# Altium PCB 把手锁主板2079.PcbDoc (part 1 of 2)
Units mm, origin at the board's own origin, x right, y up, seen from the top; angles counter-clockwise.
Board outline 151.13 x 26.04 mm, 2 copper layers (Top Layer, Bottom Layer); 73 components, 56 nets, 239 pads, 289 vias.
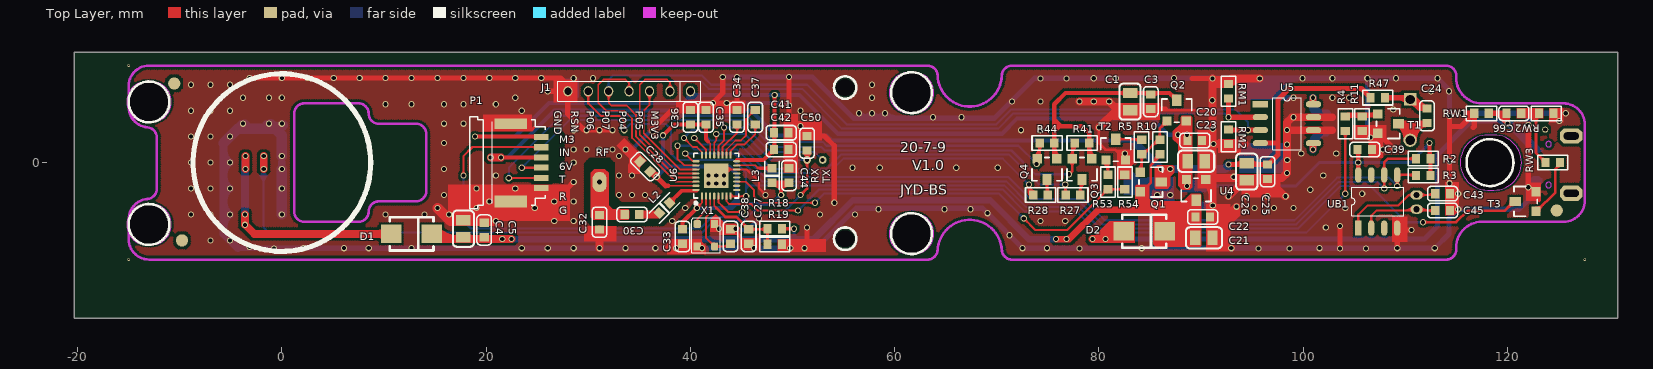
[diagram p0: Top Layer view]
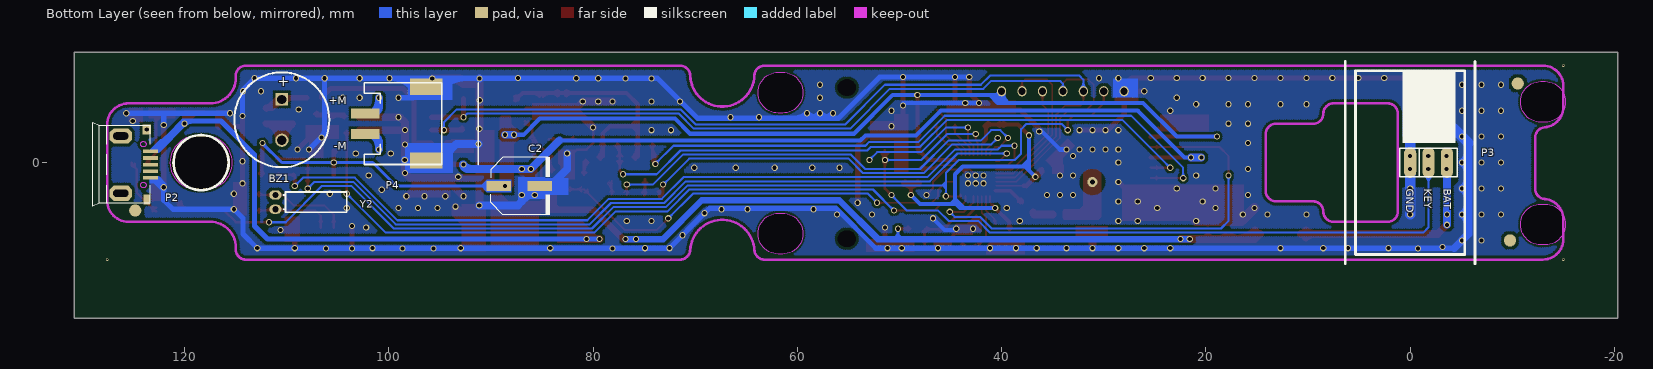
[diagram p1: Bottom Layer view, seen from below]
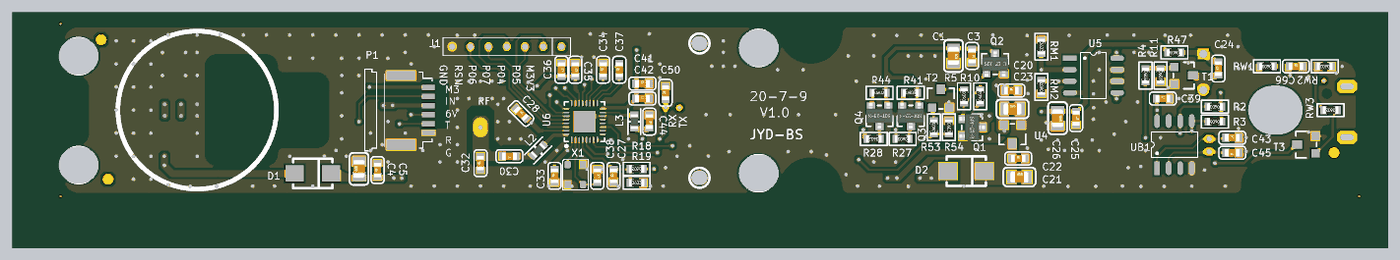
[diagram p3: 3D render of the assembled board from above, using the file's embedded part models]

## Layer stack, top to bottom
Top Layer: signal copper 0.0356
Dielectric: dielectric 0.32, FR-4, Dk 4.8
Bottom Layer: signal copper 0.0356

## Board outline
-20.32,10.795 130.81,10.795 130.81,-15.24 -20.32,-15.24
cut-out: 118.7,2.7 118.1,2.7 ccw(c118.1,0) 115.4,0 ccw(c118.1,0) 118.1,-2.7 118.7,-2.7 ccw(c118.7,0) 121.4,0 ccw(c118.7,0)
cut-out: -12.809,7.943 -13.209,7.943 ccw(c-13.209,5.943) -15.209,5.943 ccw(c-13.209,5.943) -13.209,3.943 -12.809,3.943 ccw(c-12.809,5.943) -10.809,5.943 ccw(c-12.809,5.943)
cut-out: -12.809,-4.057 -13.209,-4.057 ccw(c-13.209,-6.057) -15.209,-6.057 ccw(c-13.209,-6.057) -13.209,-8.057 -12.809,-8.057 ccw(c-12.809,-6.057) -10.809,-6.057 ccw(c-12.809,-6.057)
cut-out: 61.86,-4.957 61.46,-4.957 ccw(c61.46,-6.957) 59.46,-6.957 ccw(c61.46,-6.957) 61.46,-8.957 61.86,-8.957 ccw(c61.86,-6.957) 63.86,-6.957 ccw(c61.86,-6.957)
cut-out: 61.86,8.843 61.46,8.843 ccw(c61.46,6.843) 59.46,6.843 ccw(c61.46,6.843) 61.46,4.843 61.86,4.843 ccw(c61.86,6.843) 63.86,6.843 ccw(c61.86,6.843)

## Design rules (kind name [scope] priority, off if disabled: settings)
Clearance Clearance_2 [(IsWire)or(IsThruPin)or(IsFill)or(InPolygon)or(IsKeepOut) vs (IsWire)or(IsThruPin)or(IsFill)or(InPolygon)or(IsKeepOut)] p1 off: gap=0.254
Clearance Clearance_1 [InComponent('P2')] p2: gap=0.127
Clearance [All] p3: gap=0.2
ComponentClearance [All] p1: gap=0 collisioncheckmode=3 verticalgap=0 showdistances=FALSE
HoleSize [All] p1: absolutevalues=TRUE maxlimit=12.7 minlimit=0.025 maxpercent=80.000 minpercent=20.000
HoleToHoleClearance [All] p1: gap=0 allowstackedmicrovias=TRUE
MinimumSolderMaskSliver [All] p1: minsoldermaskwidth=0
PolygonConnect PolygonConnect_1 [IsVia] p1: connectstyle=Direct reliefconductorwidth=0.254 reliefentries=4 polygonreliefangle="90 Angle" airgapwidth=0.254
PolygonConnect [All] p2: connectstyle=Relief reliefconductorwidth=0.254 reliefentries=4 polygonreliefangle="90 Angle" airgapwidth=0.254
RoutingVias [All] p1: holewidth=7.112 width=12.7 viastyle="Through Hole" minholewidth=0.203 minwidth=0.254 maxholewidth=0.711 maxwidth=1.27
SilkToSilkClearance [All] p1: silktosilkclearance=0
SilkToSolderMaskClearance [IsPad] p1: minsilkscreentomaskgap=0 clearancetoexposedcopper=TRUE
SolderMaskExpansion [All] p1: expansion=0.102
Width [All] p1: maxlimit=2.032 minlimit=0.152 preferedwidth=0.2
22 further rules are at their usual default settings.

## Components (designator, comment, footprint, x,y, rotation, side; value= is the part's Value field where it differs from the comment)
BZ1 "BUZZER" BUZZER_D93_L40 110.49,4.191 r270 bottom
C1 "22uF" 0805C 83.058,5.969 r270 top
C2 "220uF" R5*5.8 87.249,-2.286 r180 bottom
C3 "0.1uF" 0603C 85.09,5.969 r270 top
C4 "4.7UF/24V" 0805C 17.78,-6.477 r90 top
C5 "0.1uF" 0603C 19.812,-6.604 r90 top
C20 "0.1uF" 0603C 89.408,2.159 r0 top
C21 "22uF/10V" 0805C 90.297,-7.366 r0 top
C22 "0.1uF" 0603C 90.17,-5.334 r0 top
C23 "10uF/10V" 0805C 89.535,0.127 r0 top
C24 "10uF/10V" 0603C 112.141,4.572 r90 top
C25 "0.1uF" 0603C 96.52,-0.889 r270 top
C26 "22uF" 0805C 94.488,-0.889 r270 top
C27 "1nF" 0603C 45.72,-7.239 r90 top
C28 "1uF/6.3V" 0603C 35.56,-0.381 r315 top
C30 "1.5pF" 0603C 34.29,-5.08 r180 top
C32 "1pF" 0603C 31.115,-5.842 r90 top
C33 "0.1uF" 0603C 39.243,-7.239 r90 top
C34 "0.1uF" 0603C 44.577,4.445 r90 top
C35 "1uF" 0603C 41.529,4.445 r270 top
C36 "0.1uF" 0603C 40.005,4.445 r270 top
C37 "0.1uF" 0603C 46.355,4.445 r90 top
C38 "10pF" 0603C 43.942,-7.239 r270 top
C39 "0.1uF" 0603C 106.045,1.27 r0 top
C41 "10uF/6.3V" 0603C 48.895,2.921 r0 top
C42 "0.1uF" 0603C 48.895,1.27 r0 top
C43 "22pF" 0603C 113.665,-3.048 r0 top
C44 "10uF/6.3V" 0603C 49.657,-1.27 r270 top
C45 "22pF" 0603C 113.665,-4.699 r180 top
C50 "1nF" 0603C 51.435,1.905 r90 top (schematic designator R1)
C66 "10uF/10V" 0603C 120.65,4.826 r0 top
D1 "SS14" DO-214AA 12.7,-6.985 r180 top
D2 "SS14" DO-214AA 84.455,-6.731 r180 top
J1 "7P" 7P-2.0MM_1 40.005,6.985 r180 top
L2 "2nH" 0603L 37.465,-4.445 r45 top
L3 "2.2uH" 0603L 48.006,-1.27 r90 top
P1 "指纹串口" SH-1.0-6P 25.4,0 r270 top
P2 "MICROUSB" MICRO-USB_F-B 124.86,-0.2 r270 bottom
P3 "电池盒" 3P-1.8MM 0,0 r180 bottom
P4 "电机接口" S2B-PH-SM3-TB 100.838,3.81 r90 bottom
Q1 "SI2301" "SOT-23 - GDS" 85.09,-1.905 r270 top
Q2 "SI2301" "SOT-23 - GDS" 87.63,5.08 r0 top
Q3 "BSS123W" "SOT-23 - GDS" 78.359,-0.635 r180 top
Q4 "BSS123W" "SOT-23 - GDS" 74.93,-0.635 r180 top
R2 "10K" 0603R 111.76,0.381 r180 top
R3 "10K" 0603R 111.76,-1.27 r180 top
R4 "1K" 0603R 104.14,3.81 r270 top
R5 "1K" 0603R 84.201,1.524 r90 top (schematic designator R53)
R10 "100K" 0603R 85.979,1.524 r90 top
R11 "20K" 0603R 105.791,3.81 r270 top
R18 "510%1" 0603R 48.26,-6.477 r180 top
R19 "100K%1" 0603R 48.26,-8.001 r0 top
R27 "10R" 0603R 77.47,-3.175 r180 top
R28 "10R" 0603R 74.295,-3.175 r180 top
R41 "10K" 0603R 78.359,1.905 r0 top
R44 "10K" 0603R 74.93,1.905 r0 top
R47 "2R2" 0603R 107.315,6.35 r180 top
R53 "4.7K" 0603R 80.899,-1.905 r90 top
R54 "100K" 0603R 82.55,-1.905 r270 top
RM1 "10K" 0603R 92.71,6.985 r270 top
RM2 "10K" 0603R 92.71,2.54 r90 top
RW1 "100K" 0603R 117.475,4.826 r180 top
RW2 "100K" 0603R 123.825,4.826 r180 top
RW3 "22R" 0603R 124.46,0 r180 top
T1 "SS8050" SOT-23-3L 108.331,3.81 r270 top
T2 "PMBT3904" SOT-23-3L 81.661,1.27 r0 top
T3 "PMBT3904" SOT-23-3L 121.793,-3.81 r90 top
U4 "HT7533" SOT-23-3L 89.535,-2.667 r180 top
U5 "CP2117" SOP8 98.425,3.81 r0 top
U6 "BK3431Q" QFN32_4*4*0.4 42.545,-1.27 r90 top
UB1 "PCF8563" SOP8 107.315,-3.81 r90 top
X1 "16MHZ" XTAL3225 41.529,-7.112 r270 top
Y2 "32.768KHZ" 晶振-9 111.125,-3.175 r270 bottom

## Footprints (in the part's own frame and the unit in brackets; to place one, negate y for a bottom-side part, rotate by r counter-clockwise, add the part's x,y. Pads: shape width x height; smd on the part's side, far side on the other; paste and mask are expansions set on the pad)
3P-1.8MM [mm]
  oval 1.2x3 smd: 1(0,0) 2(1.8,0) 3(3.6,0)
  silkscreen extent -1,-1.4 4.6,1.4
7P-2.0MM_1 [mm]
  oval 0.9x1 hole 0.7 mask+0.05: 1(0,0) 2(2,0) 3(4,0) 4(6,0) 5(8,0) 6(10,0) 7(12,0)
  silkscreen extent -1,-1 13,1
0603C [mm]
  rect 0.8x0.9 smd: 1(-0.711,0) 2(0.711,0)
  silkscreen extent -1.47,-0.71 1.47,0.71, body extent -0.8,-0.4 0.8,0.4, height 0.3
0603L [mm]
  rect 0.8x0.9 smd: 1(-0.711,0) 2(0.711,0)
  silkscreen extent -1.4,-0.7 1.4,0.7, body extent -1.21,-1.21 1.21,1.21, height 0.46
0603R [mm]
  rect 0.8x0.9 smd: 1(-0.711,0) 2(0.711,0)
  silkscreen extent -1.47,-0.71 1.47,0.71, body extent -0.85,-0.4 0.85,0.4, height 0.56
0805C [mil]
  rect 40x56 smd: 1(-33,0) 2(33,0)
  silkscreen extent -70,-41 70,41, body extent -39,-25 39,25, height 30
BUZZER_D93_L40 [mm]
  rect 1.2x1.2 hole 0.9: 1(-2,0)
  round 1.3 hole 0.9: 2(2,0)
  silkscreen extent -4.65,-4.65 4.65,4.65
DO-214AA [mm]
  rect 2x1.8 smd: 1(2,0) 2(-2,0)
  silkscreen extent -2.15,-1.63 2.15,1.63
MICRO-USB_F-B [mm]
  rect 0.36x1.5 smd mask+0.05: 1(-1.3,1.5) 2(-0.65,1.5) 3(0,1.5) 4(0.65,1.5) 5(1.3,1.5)
  oct 1.5x2.2 hole 0.7 slot 1.5 at 90 deg mask+0.05: 6(2.8,-1.4) 7(-2.8,-1.4)
  rect 1x0.6 smd: 8(3.429,1.143)
  rect 1x0.8 / inner rect 1x0.8 / far side round 0.6 hole 0.4 unplated: 9(-3.429,1.143)
  Keep-Out Layer circle w0.1: c2,0.813 r0.275
  Keep-Out Layer circle w0.1: c-2,0.813 r0.275
  silkscreen extent -4.1,-4.14 4.1,1.5
QFN32_4*4*0.4 [mm]
  rect 2.4x2.4 smd paste-0.025 mask+0.051: 0(0,0)
  oval 0.7x0.2 smd paste-0.025 mask+0.051: 1(-2,1.4) 2(-2,1) 3(-2,0.6) 4(-2,0.2) 5(-2,-0.2) 6(-2,-0.6) 7(-2,-1) 8(-2,-1.4) 17(2,-1.4) 18(2,-1) 19(2,-0.6) 20(2,-0.2) 21(2,0.2) 22(2,0.6) 23(2,1) 24(2,1.4)
  oval 0.2x0.7 smd paste-0.025 mask+0.051: 9(-1.4,-2) 10(-1,-2) 11(-0.6,-2) 12(-0.2,-2) 13(0.2,-2) 14(0.6,-2) 15(1,-2) 16(1.4,-2) 25(1.4,2) 26(1,2) 27(0.6,2) 28(0.2,2) 29(-0.2,2) 30(-0.6,2) 31(-1,2) 32(-1.4,2)
  silkscreen extent -2.82,-2.2 2.2,2.2
R5*5.8 [mm]
  rect 2.4x1 smd: 1(-2,0) 2(2,0)
  silkscreen extent -2.8,-2.85 3,2.85
S2B-PH-SM3-TB [mm]
  rect 1x2.8 smd mask+0.05: 1(-1,1.5) 2(1,1.5)
  rect 1.6x3.2 smd mask+0.05: A(-3.6,-4.5) B(3.6,-4.5)
  silkscreen extent -4,-9.6 4,1.6
SH-1.0-6P [mm]
  rect 0.6x1.4 smd paste+0: 1(-2.5,0) 2(-1.5,0) 3(-0.5,0) 4(0.5,0) 5(1.5,0) 6(2.5,0)
  rect 1x3.2 smd paste+0: A(-3.8,-3)
  rect 1.2x3.2 smd: B(3.8,-3)
  silkscreen extent -4.5,-7 4.5,0.4
SOP8 [mm]
  rect 1.5x0.6 smd mask+0.05: 1(-2.6,1.905)
  oval 1.5x0.6 smd mask+0.05: 2(-2.6,0.635) 3(-2.6,-0.635) 4(-2.6,-1.905) 5(2.6,-1.905) 6(2.6,-0.635) 7(2.6,0.635) 8(2.6,1.905)
  round 0.4 on Top Overlay mask+0.05: ""(-0.949,1.905)
  silkscreen extent -1.4,-2.54 1.4,2.54
"SOT-23 - GDS" [mil]
  rect 36x43.31 smd: D(0,40)
  rect 36x36 smd: G(-37.4,-40) S(37.4,-40)
  silkscreen extent -57,-45 58,45, body extent -57,-55 57,55, height 47
SOT-23-3L [mil]
  rect 36x36 smd: 1(-37.4,-40) 2(37.4,-40)
  rect 36x43.31 smd: 3(0,40)
  silkscreen extent -57,-45 58,45
XTAL3225 [mm]
  rrect50% 0.8x0.7 smd: 1(-1.1,-0.85) 3(1.1,0.85)
  rect 0.8x0.7 smd: 2(1.1,-0.85) 4(-1.1,0.85)
  silkscreen extent -1.7,-1.4 1.7,1.4
晶振-9 [mm]
  oval 0.9x1.2 hole 0.6: 1(0,0) 2(1.4,0)
  rect 0x0 smd: 3(0.635,8)
  silkscreen extent -0.3,0.76 1.7,7

## Part data
BZ1: "Buzzer"
C1 C3 C4 C5: library part "CAP NP"
C20 C22 C25 C26 C27 C66: library part CAP-NP, "Capacitor, Ceramic"
C21 C23: library part CAP-P, "Capacitor, tolerance ±20%"
C24: library part C_0_Dup1
C28 C30 C32 C33 C34 C35 C36 C37 C38 C41 C42 C44: library part Cap, "Capacitor"
C39 C43 C45: library part C
C50 RM1 RM2: library part Pro71C3.TMP_UnNamed_1
D1 D2: library part D
L2 L3: "Power Inductor, 4.7uH, 0.7A, 260mR DCR"
P1: library part "Header 6", "Header, 6-Pin"
P2 P4: library part MHDR1X2, "Header, 2-Pin"
P3: library part "Header 3", "Header, 3-Pin"
Q1 Q2: library part PWRMOSFET_EP_DGS_0
Q3 Q4: library part BSS123L_0
R2 R3 R41 R44: library part RES
R4 R11 R27 R28 R47: library part R_Dup1
R5 R10 R53 R54 RW1 RW2 RW3: library part R
R18 R19: library part Res2, "Resistor"
T1 T2 T3: library part NPN_BJT, "Bipolar Junction Transistor"
U4: library part XC6206P302M
U5: library part AM24LC02_0
UB1: library part IC8
Y2: library part 晶振

## Free pads (board coordinates)
  round 0.762 / inner round 0.762 / far side round 0.61 hole 0.406: 0(52.959,0.254) 2(51.435,0.254)
  round 0.254 hole 0.127: 1(-15,-9.5) 2(-15,9.5) 3(127.6,-9.5)
  round 1 hole 2.3 slot 2.7 at 0 deg: 1(-13.009,-6.057) 2(-13.009,5.943) 5(61.66,-6.957) 6(61.66,6.843)
  round 0.6 hole 1.6 slot 1.8 at 0 deg: 3(55.16,-7.457) 4(55.16,7.343)
  round 1 hole 2.8 slot 3 at 0 deg: 7(118.4,0)
  round 1.2 all layers, no hole: MARK(-10.541,7.747) MARK(-9.779,-7.62) MARK(124.841,-4.699)
  oval 1.4x2 / inner oval 1x1.4 / far side round 1 hole 0.5: RF(31.115,-1.905)

## Via types
v1: diameter 0.61, hole 0.406, Top Layer to Bottom Layer, tented both sides, 289 vias

## Nets (pads, with @x,y where several pads share a name; then routed paths per layer and width w, separated by ;. In a path a pad name is that pad's centre, name@x,y a point inside that pad or via, vN(x,y) a via of type N, cw(c..) or ccw(c..) an arc to the next point about the centre after c; other vN are vias at no path point)
ANT: 
BAT_ADC: C27.2 R18.2 R19.1 U6.4 | length 18.7
  Top Layer w0.152: R19.1@47.32,-7.722 ccw(c46.89,-7.292) 47.498,-7.292 ; R18.2@47.32,-6.756 cw(c46.89,-7.186) 47.498,-7.186 ; 47.498,-7.431 cw(c48.453,-7.431) R18.2@47.778,-6.756 ; 47.498,-7.415 ccw(c48.085,-7.415) R19.1@47.67,-7.83 ; 47.498,-7.063 cw(c48.085,-7.063) R18.2@47.67,-6.648 ; 47.498,-7.047 ccw(c48.453,-7.047) R19.1@47.778,-7.722 ; R19.1@47.549,-8.001 47.498,-7.95 47.498,-6.528 R18.2@47.549,-6.477
  Top Layer w0.178: U6.4@42.345,-3.27 42.345,-4.242 42.548,-4.445
  Top Layer w0.254: 42.548,-4.445 43.437,-5.334 44.526,-5.334 C27.2@45.72,-6.528 47.498,-6.528 47.549,-6.579 R19.1@47.549,-8.001 ; 45.169,-5.976 cw(c44.617,-6.528) C27.2@45.397,-6.528 ; 45.289,-6.097 ccw(c45.67,-5.716) C27.2@45.67,-6.255 ; C27.2@45.963,-6.721 cw(c46.429,-7.187) 46.429,-6.528 cw(c46.429,-5.869) C27.2@45.963,-6.335 ; 46.888,-6.528 ccw(c46.888,-5.866) R18.2@47.356,-6.334 ; 46.892,-6.528 cw(c46.892,-7.184) 47.356,-6.72 cw(c46.89,-7.186) 47.549,-7.186 cw(c48.208,-7.186) R18.2@47.742,-6.72 ; R19.1@47.356,-7.758 ccw(c46.89,-7.292) 47.549,-7.292 ccw(c48.208,-7.292) R19.1@47.742,-7.758
BEEP: R4.2 U6.7 | length 75.8
  Top Layer w0.178: U6.7@43.545,-3.27 43.545,-3.794 43.815,-4.064
  Top Layer w0.203: 43.815,-4.064 45.466,-4.064 45.974,-4.064 46.609,-4.699 v1(50.546,-4.699) ; v1@50.402,-4.843 ccw(c50.055,-5.19) 50.055,-4.699 ccw(c50.055,-4.208) v1@50.402,-4.555
  Top Layer w0.254: R4.2@103.947,2.906 cw(c103.481,2.44) 104.14,2.44 cw(c104.799,2.44) R4.2@104.333,2.906 ; v1@104.014,-2.922 ccw(c103.711,-2.619) 104.14,-2.619 ccw(c104.569,-2.619) v1@104.266,-2.922 ; v1(104.14,-3.048) R4.2@104.14,3.099
  Bottom Layer w0.203: v1(50.546,-4.699) 52.603,-2.642 70.587,-2.642 72.717,-4.772 77.797,-4.772 79.883,-6.858 100.33,-6.858 v1(104.14,-3.048) ; v1@50.546,-4.496 ccw(c50.546,-4.005) 50.893,-4.352 ccw(c51.24,-4.699) v1@50.749,-4.699 ; v1@103.937,-3.048 cw(c103.446,-3.048) 103.793,-3.395 cw(c104.14,-3.742) v1@104.14,-3.251
GND: C1.2 C2.2 C3.2 C4.2 C5.2 C20.2 C21.2 C22.2 C23.2 C25.2 C26.2 C27.1 C28.1 C32.1 C33.1 C34.2 C35.1 C36.1 C38.1 C39.2 C41.2 C42.2 C43.2 C44.1 C45.1 C50.2 J1.7 P1.6 P1.A P1.B P2.5 P3.1 P4.A P4.B R11.2 R19.2 R54.1 RM1.1 RM2.1 RW1.2 RW2.1 T1.2 T2.2 T3.2 U4.1 U5.6 U5.7 U6.0 U6.14 UB1.4 X1.2 X1.4 | length 662.3
  Top Layer w0.178: v1(42.545,-1.27) U6.0@43.145,-0.67 ; U6.0@42.545,-1.054 ccw(c42.545,-0.533) 42.914,-0.901 ccw(c43.282,-1.27) U6.0@42.761,-1.27
  Top Layer w0.2: U6.0@43.145,-0.67 U6.14@44.545,-0.67 45.501,-0.67 46.736,-1.905 46.736,-2.54 v1(47.371,-3.175) ; v1@47.166,-3.175 ccw(c46.672,-3.175) 47.021,-2.825 ccw(c47.371,-2.476) v1@47.371,-2.97
  Top Layer w0.254: C38.1@43.992,-6.801 cw(c43.992,-7.768) 44.676,-7.084 ; C38.1@44.12,-6.528 C27.1@45.542,-7.95 ; C38.1@44.265,-6.528 ccw(c44.616,-6.528) C38.1@44.368,-6.776 ; C38.1@44.374,-6.604 ccw(c44.803,-6.604) 44.5,-6.908 ; v1@44.628,-6.604 ccw(c45.67,-6.604) 44.933,-7.341 ; 44.986,-7.394 ccw(c45.67,-6.71) C27.1@45.67,-7.677 ; C27.1@45.294,-7.702 cw(c45.046,-7.95) C27.1@45.397,-7.95 ; v1@79.884,3.303 cw(c79.581,3) 80.01,3 cw(c80.439,3) v1@80.136,3.303 ; v1(80.01,3.429) 80.01,1.905 80.645,1.27 81.595,1.27 82.55,0.315 T2.2@82.611,0.254 ; T2.2@82.281,0.254 ccw(c81.484,0.254) 82.047,0.818 ccw(c82.611,1.381) T2.2@82.611,0.584 ; v1@82.424,0.763 cw(c82.121,0.46) 82.55,0.46 cw(c82.979,0.46) v1@82.676,0.763 ; C3.2@85.09,5.131 C3.2@85.09,5.258 ; 86.419,5.131 91.135,5.131
  Top Layer w0.305: v1@71.374,5.969 v1(71.501,5.969)
  Top Layer w0.508: v1(-3.175,8.285) 27.275,8.285 28.005,7.555 J1.7@28.005,6.985 ; v1(19.05,-2.54) v1(22.86,-2.54) 27.94,-2.54 v1(28.575,-1.905) ; v1(26.035,6.985) J1.7@28.005,6.985 ; 27.303,8.257 cw(c26.08,7.035) J1.7@27.809,7.035 ; J1.7@27.866,6.796 cw(c27.532,6.462) 28.005,6.462 cw(c28.478,6.462) J1.7@28.144,6.796 ; J1.7@27.866,6.846 ccw(c27.532,6.512) 27.532,6.985 ccw(c27.532,7.458) J1.7@27.866,7.124 ; J1.7@27.866,7.174 ccw(c27.532,7.508) 28.005,7.508 ccw(c28.478,7.508) J1.7@28.144,7.174 ; 29.325,3.441 ccw(c29.845,3.962) v1@29.845,3.226 ; v1(32.385,3.175) 29.591,3.175 28.005,4.761 J1.7@28.005,6.985 ; v1@36.195,3.175 38.176,5.156 C36.1@40.005,5.156 C35.1@41.529,5.156 ; 37.592,-8.382 v1(38.608,-8.382) ; 37.798,-8.382 ccw(c37.798,-6.555) C33.1@39.09,-7.847 ; v1@38.682,-8.308 cw(c39.193,-8.819) C33.1@39.193,-8.096 ; C33.1@39.047,-7.948 cw(c38.608,-7.943) v1(38.608,-8.382) ; 39.936,-7.95 cw(c39.936,-8.905) X1.2@40.611,-8.23 ; X1.2@40.567,-8.1 ccw(c41.126,-7.54) v1@41.147,-8.331 ; X1.2@40.752,-8.2 ccw(c41.148,-7.861) v1(41.148,-8.382) 40.849,-8.382 X1.2@40.679,-8.212 40.417,-7.95 C33.1@39.243,-7.95 39.04,-7.95 v1(38.608,-8.382) ; C35.1@41.725,5.156 cw(c42.198,5.156) C35.1@41.864,5.491 ; X1.4@42.379,-6.012 42.895,-6.528 C38.1@43.942,-6.528 C38.1@44.12,-6.528 ; X1.4@42.447,-5.994 ccw(c43.735,-4.706) C38.1@43.735,-6.528 ; v1@42.835,-6.416 ccw(c43.106,-6.145) 43.106,-6.528 ; v1@43.18,8.255 43.18,6.807 C35.1@41.529,5.156 ; v1@44.577,8.255 C34.2@44.577,5.156 C35.1@41.529,5.156 ; C27.1@45.542,-7.95 C27.1@45.72,-7.95 45.796,-7.95 v1(46.228,-8.382) ; R19.2@48.971,-8.001 49.352,-8.382 v1(49.784,-8.382) ; R19.2@49.099,-7.98 ccw(c49.784,-7.597) v1(49.784,-8.382) ; R19.2@49.187,-8.217 ccw(c49.565,-7.839) v1@49.765,-8.335 ; C42.2@49.503,1.117 cw(c49.131,0.745) 49.657,0.745 ; C42.2@49.503,1.423 ccw(c49.131,1.795) 49.657,1.795 ; C41.2@49.503,2.768 cw(c49.131,2.396) 49.657,2.396 ; C41.2@49.503,3.074 ccw(c49.131,3.446) 49.657,3.446 ; C41.2@49.606,2.921 C41.2@49.657,2.972 ; C41.2@49.606,3.117 ccw(c49.606,3.59) C41.2@49.941,3.256 ; C44.1@49.657,-0.559 C41.2@49.657,2.616 ; v1@49.657,8.255 C41.2@49.657,2.972 ; C41.2@49.709,2.974 ccw(c50.574,3.839) 50.574,2.616 ; C41.2@49.759,3.074 cw(c50.8,2.033) v1@50.8,3.505 ; C41.2@49.962,3.277 cw(c50.579,2.66) v1@50.788,3.507 ; v1@50.885,3.471 cw(c50.03,2.616) C50.2@51.239,2.616 ; v1@51.145,-8.346 ccw(c50.445,-7.646) 51.435,-7.646 ; v1@51.181,-8.331 ccw(c51.181,-7.105) 52.048,-7.972 ; v1(51.435,-6.35) 51.435,-8.128 v1(51.181,-8.382) ; 52.07,-7.95 51.638,-8.382 v1(51.181,-8.382) ; v1(54.102,-3.937) 54.102,1.651 53.137,2.616 C50.2@51.435,2.616 ; v1@66.523,4.369 v1@66.548,4.394 ; R54.1@82.55,-1.194 82.55,0.315 v1(82.55,0.889) ccw(c83.242,0.889) T2.2@82.754,0.398 ; 82.55,-0.384 cw(c83.249,-0.384) T2.2@82.755,0.11 ; C1.2@83.058,5.131 83.185,5.258 C3.2@85.09,5.258 86.546,5.258 ; C1.2@83.441,4.951 cw(c84.181,4.211) 84.181,5.258 ; 89.154,8.23 v1(91.135,8.23) ; 92.275,8.23 cw(c92.275,7.35) RM1.1@92.929,7.938 ; RM1.1@92.375,8.031 cw(c92.041,7.696) RM1.1@92.514,7.696 ; RM1.1@92.551,7.599 ccw(c91.135,6.325) v1(91.135,8.23) ; RM1.1@92.71,7.696 92.612,7.794 92.177,8.23 v1(91.135,8.23) ; C25.2@96.545,-1.626 C25.2@96.571,-1.651 ; v1(103.632,-8.407) v1(103.632,-6.223) ; R11.2@105.791,3.099 R11.2@106.03,2.86 ; R11.2@105.952,3.193 ccw(c106.672,3.804) 106.672,2.86 ; R11.2@105.987,3.099 ccw(c106.46,3.099) R11.2@106.126,2.764 ; 106.214,2.676 ccw(c106.604,3.066) 106.604,2.515 ccw(c106.604,3.398) T1.2@107.228,2.773 ; v1@106.555,2.451 ccw(c106.03,2.319) R11.2@106.03,2.86 ; v1@106.568,2.428 cw(c106.113,1.973) 106.756,1.973 ; v1@106.65,2.442 cw(c107.315,2.122) T1.2@107.315,2.86 ; 106.672,1.875 ccw(c107.311,1.875) C39.2@106.859,1.423 ; v1@106.672,2.497 cw(c107.341,2.497) T1.2@107.293,3.164 ; 106.756,1.944 cw(c107.485,1.944) T1.2@107.352,2.66 ; 106.756,2.07 cw(c107.344,2.07) T1.2@107.322,2.657 ; v1@106.756,2.555 cw(c107.372,2.555) T1.2@107.259,3.16 ; T1.2@107.112,2.86 cw(c106.621,2.86) 106.968,2.513 cw(c107.315,2.166) 107.315,2.657 cw(c107.315,2.019) T1.2@107.766,2.47 ; v1(107.823,1.27) C39.2@106.756,1.27 ; v1(108.966,1.27) 107.376,2.86 T1.2@107.315,2.86 ; v1(109.22,-8.382) UB1.4@109.22,-6.41 109.414,-6.604 v1(110.617,-6.604) ; UB1.4@109.253,-6.377 ccw(c109.799,-5.831) 109.799,-6.604 ; 114.351,-4.235 ccw(c114.79,-4.235) C45.1@114.479,-4.546 ; 114.351,-3.512 cw(c114.79,-3.512) C43.2@114.479,-3.201 ; 114.351,-2.584 ccw(c114.79,-2.584) C43.2@114.479,-2.895 ; v1(114.351,4.572) 114.351,3.525 ; C43.2@114.376,-3.048 v1(115.189,-3.048) ; C45.1@114.479,-4.752 cw(c114.915,-5.187) v1@114.915,-4.572 ; v1(115.189,-4.572) 114.503,-4.572 C45.1@114.376,-4.699 114.351,-4.674 v1(114.351,-2.032) v1(114.351,0.127) 114.351,3.525 ; v1(115.57,4.826) RW1.2@116.764,4.826 ; RW1.2@116.429,4.491 cw(c116.764,4.157) RW1.2@116.764,4.63 ; 116.666,3.444 116.764,3.541 RW1.2@116.764,4.826 ; v1(122.047,3.683) v1(122.047,-2.413) 122.494,-2.86 T3.2@122.809,-2.86 ; v1@122.205,-2.571 ccw(c122.543,-2.232) T3.2@122.73,-2.673 ; RW2.1@124.536,4.826 v1(125.73,4.826) ; C38.1@44.143,-6.528 cw(c44.143,-6.911) v1@44.414,-6.64 ; C38.1@44.143,-6.528 cw(c44.143,-6.911) v1@44.414,-6.64 ; C38.1@44.143,-6.528 cw(c44.143,-6.911) v1@44.414,-6.64 ; C38.1@44.143,-6.528 cw(c44.143,-6.911) v1@44.414,-6.64 ; C41.2@49.657,2.616 C41.2@49.657,2.972 ; C41.2@49.657,2.616 C50.2@51.435,2.616 ; C41.2@49.657,2.972 50.241,3.556 v1(50.8,3.556) 51.435,2.921 C50.2@51.435,2.616 ; v1(49.784,-8.382) v1(51.181,-8.382) ; R11.2@106.03,2.86 v1@106.672,2.217 ; R11.2@106.03,2.86 106.672,2.86 ; v1@106.672,2.217 106.672,2.86 ; v1@106.672,2.217 106.672,1.354 C39.2@106.756,1.27 ; v1@106.672,2.217 106.756,2.134 ; 106.672,2.86 T1.2@107.315,2.86 ; C39.2@106.756,1.27 106.756,2.134 ; 106.756,2.134 106.756,2.301 T1.2@107.315,2.86 ; 106.824,2.86 cw(c106.824,2.369) T1.2@107.171,2.716 ; 106.824,2.86 ccw(c106.824,3.351) T1.2@107.171,3.004 ; 106.824,2.86 cw(c106.824,2.369) T1.2@107.171,2.716 ; 106.824,2.86 ccw(c106.824,3.351) T1.2@107.171,3.004 ; 106.824,2.86 cw(c106.824,2.369) T1.2@107.171,2.716 ; 106.824,2.86 ccw(c106.824,3.351) T1.2@107.171,3.004 ; 114.351,3.525 115.463,3.525 RW1.2@116.764,4.826 ; v1@106.577,2.421 cw(c106.38,2.1) 106.756,2.1 ccw(c106.38,2.1) v1@106.577,2.421
  Top Layer w0.762: C5.2@19.812,-5.893 19.812,-5.715 19.812,-4.699 ; v1(31.115,-8.382) C32.1@31.115,-6.553 ; v1(78.105,5.969) v1(79.502,5.969) v1(81.026,5.969) 81.737,5.258 C1.2@83.185,5.258 ; v1(80.01,3.429) 81.712,5.131 C1.2@83.058,5.131 C3.2@85.09,5.131 ; 82.242,5.258 cw(c82.242,4.518) C1.2@82.765,5.041 ; C20.2@90.119,2.159 91.135,2.159 ; C23.2@90.298,-0.179 cw(c89.096,-1.826) 91.135,-1.826 ; C23.2@90.312,0.442 ccw(c89.555,1.829) v1@91.135,1.829 ; C23.2@90.373,0.127 91.135,0.127 ; U4.1@90.431,-1.705 cw(c88.731,-3.405) 91.135,-3.405 ; U4.1@90.431,-1.597 ccw(c88.731,0.103) 91.135,0.103 ; U4.1@90.485,-1.651 91.135,-1.651 ; 90.624,2.159 cw(c90.624,1.216) v1@91.291,1.883 ; C23.2@90.678,-0.227 ccw(c90.256,0.544) 91.135,0.544 ; C23.2@90.748,0.437 cw(c90.191,-0.326) 91.135,-0.326 ; C22.2@90.868,-5.397 cw(c90.222,-6.043) 91.135,-6.043 ; C22.2@90.868,-5.271 ccw(c90.222,-4.625) 91.135,-4.625 ; C22.2@90.881,-5.334 C22.2@91.135,-5.334 ; C21.2@91.135,-7.696 cw(c91.135,-8.493) 91.699,-7.93 ; C21.2@91.135,-7.036 ccw(c91.135,-6.239) 91.699,-6.802 ; 91.262,-1.524 92.202,-1.524 97.917,-1.524 v1(98.425,-1.016) v1(98.425,1.778) v1(98.425,3.2) ; v1(92.71,-3.302) 94.285,-1.727 C26.2@94.488,-1.727 v1(94.488,-3.302) ; RM1.1@92.773,7.683 cw(c94.094,6.363) 94.094,8.23 ; RM1.1@92.779,7.696 cw(c93.419,7.696) 92.966,8.149 ; v1@92.964,-8.349 92.118,-8.349 C21.2@91.135,-7.366 ; v1@93.488,-1.524 cw(c93.488,-2.524) C26.2@94.195,-1.817 ; 94.286,1.829 RM2.1@92.71,1.829 v1(91.237,1.829) v1@91.135,1.829 ; C26.2@94.781,-1.817 cw(c95.488,-2.524) 95.488,-1.524 ; v1(95.758,8.23) 93.047,8.23 92.514,7.696 91.669,7.696 v1(91.135,8.23) 91.135,5.131 91.135,2.159 ; v1(96.52,-3.302) C25.2@96.52,-1.6 96.545,-1.626 98.222,-3.302 v1(98.298,-3.302) ; 102.87,3.175 U5.6@101.025,3.175 98.45,3.175 v1(98.425,3.2) ; 102.87,4.445 U5.7@101.025,4.445 98.933,4.445 98.425,3.937 v1(98.425,3.2) ; C21.2@91.135,-7.366 93.472,-5.029 v1(93.472,-4.318) 92.456,-5.334 C22.2@91.135,-5.334 ; C21.2@91.135,-7.366 C22.2@91.135,-5.334 ; C22.2@91.135,-5.334 91.135,-1.651 ; 91.135,-1.651 91.135,0.127 ; 91.135,0.127 v1@91.135,1.829 ; v1@91.135,1.829 91.135,2.159 ; U4.1@90.539,-1.705 cw(c90.976,-2.142) 90.976,-1.524 ccw(c90.976,-2.142) U4.1@90.539,-1.705
  Top Layer w1.016: v1(15.24,-4.445) 16.51,-5.715 19.812,-5.715 v1(20.955,-5.715) ; 15.863,-5.068 ccw(c16.383,-4.547) v1@16.383,-5.283 ; v1@16.239,-5.224 ccw(c17.425,-4.038) C4.2@17.425,-5.715
  Bottom Layer w0.406: 34.29,1.27 v1@36.195,3.175 ; v1(42.215,5.842) v1@49.657,5.842 ; v1@44.45,-6.604 45.593,-6.604 v1(46.736,-5.461)
  Bottom Layer w0.508: -4.318,-8.382 v1(2.134,-8.382) v1(6.096,-8.382) v1(8.509,-8.382) v1(12.7,-8.382) v1(23.495,-8.382) v1(26.035,-8.382) v1(28.575,-8.382) v1(31.115,-8.382) v1(33.655,-8.382) v1(36.576,-8.382) v1(38.608,-8.382) v1(41.148,-8.382) v1(46.228,-8.382) v1(49.784,-8.382) v1(51.181,-8.382) 52.324,-8.382 56.236,-4.47 68.605,-4.47 v1(69.088,-4.953) v1(72.517,-8.382) v1(84.201,-8.382) v1(92.964,-8.382) v1(109.22,-8.382) v1(112.903,-8.382) 114.3,-6.985 114.3,-5.461 v1(115.189,-4.572) 121.158,-4.572 122.047,-3.683 v1(122.047,-2.413) 122.047,-2.159 122.631,-1.575 P2.5@123.063,-1.575 ; -3.604,-8.382 ccw(c-3.604,-7.826) v1@-3.211,-8.219 ; v1@-3.139,-8.219 ccw(c-2.746,-7.826) -2.746,-8.382 ; P3.1@0,0 v1(0,0.635) ; v1(33.655,1.27) 34.29,1.27 ; v1(43.18,8.382) v1(44.577,8.382) v1(49.657,8.382) 51.943,8.382 55.988,4.337 69.793,4.337 73.711,8.255 v1(79.502,8.255) v1(81.661,8.255) v1(99.949,8.255) v1(102.87,8.255) v1(106.299,8.255) ; 56.482,4.337 ccw(c56.482,6.129) v1@57.749,4.862 ; v1@56.551,4.862 ccw(c57.818,6.129) 57.818,4.337 ; 57.752,4.337 ccw(c57.752,6.129) v1@59.019,4.862 ; v1@57.821,4.862 ccw(c59.088,6.129) 59.088,4.337 ; v1@59.091,4.862 ccw(c60.358,6.129) 60.358,4.337 ; 92.18,8.255 cw(c92.18,4.052) P4.B@95.152,7.024 ; 93.406,8.255 cw(c93.406,5.278) P4.B@95.511,7.383 ; 94.633,8.255 cw(c94.633,6.505) P4.B@95.87,7.742 ; P4.B@95.83,7.41 96.603,7.41 97.663,6.35 v1@98.933,6.35 ; v1@95.859,8.255 cw(c95.859,7.731) P4.B@96.23,8.102 ; P4.B@96.36,8.003 cw(c96.869,7.615) 96.869,8.255 ; P4.B@96.764,7.695 cw(c97.896,6.832) 97.896,8.255 ; P4.B@97.168,7.387 cw(c98.922,6.049) 98.922,8.255 ; P4.B@97.572,7.079 cw(c99.949,5.265) v1(99.949,8.255) ; 106.299,3.322 ccw(c107.462,3.322) v1@106.64,2.5 ; v1(107.823,1.27) 106.299,2.794 v1(106.299,8.255) ; 114.123,7.289 cw(c113.82,6.985) v1@114.249,6.985 ; v1(114.351,4.572) 114.351,7.061 v1(113.157,8.255) v1(109.093,8.255) v1(106.299,8.255) ; v1(115.57,4.826) 122.047,4.826 ; v1(122.047,3.683) 122.047,4.826 ; v1@122.098,-2.413 cw(c122.834,-2.413) 122.313,-1.893 ; v1(125.73,4.826) 122.047,4.826
  Bottom Layer w0.762: -5.715,-6.429 cw(c-3.731,-6.429) v1@-5.134,-5.026 ; -5.715,-3.889 cw(c-3.731,-3.889) v1@-5.134,-2.486 ; -5.715,-3.731 ccw(c-3.731,-3.731) v1@-5.134,-5.134 ; -5.715,-1.349 cw(c-3.731,-1.349) v1@-5.134,0.054 ; -5.715,-1.191 ccw(c-3.731,-1.191) v1@-5.134,-2.594 ; -5.715,1.349 ccw(c-3.731,1.349) v1@-5.134,-0.054 ; -5.715,1.905 -5.715,-6.985 -4.318,-8.382 ; v1(0,-0.635) P3.1@0,0 ; v1(82.55,0.889) 82.55,-0.635 83.947,-2.032 84.614,-2.032 85.217,-2.032 87.376,-4.191 v1(91.161,-4.191) ; C2.2@85.406,-2.221 cw(c84.452,-3.175) v1@85.801,-3.175 ; v1@85.725,-3.099 cw(c85.725,-4.448) 86.679,-3.494 ; 86.041,-2.856 ccw(c86.995,-1.902) v1@86.995,-3.251 ; v1@86.926,-3.144 ccw(c87.519,-3.412) 87.058,-3.873 ; v1(91.135,8.23) v1@91.135,8.235 ; v1(91.237,1.829) 93.387,1.829 94.962,0.254 v1(98.45,0.254) ; 93.915,1.301 ccw(c95.538,2.924) P4.A@95.538,0.629 ; P4.A@97.434,-0.086 cw(c98.256,-0.908) v1@98.256,0.254 ; P4.A@97.434,0.506 ccw(c98.043,1.115) 98.043,0.254
  Bottom Layer w1.016: -5.715,1.905 -4.318,3.302 ; v1@-3.954,3.666 ccw(c-3.074,4.546) -3.074,3.302 ; v1@-3.631,3.714 cw(c-4.318,4.081) -4.318,3.302 ; -2.006,3.302 ccw(c-2.006,4.546) v1@-1.126,3.666 ; v1@-1.429,3.683 ccw(c-0.635,4.319) -0.635,3.302 ; v1@-1.079,3.746 ccw(c-0.42,4.406) v1@0.117,3.644 ; v1(0,-5.08) v1(0,-2.54) v1(0,-0.635) ; v1(0,0.635) 0,2.667 -0.635,3.302 ; -4.318,3.302 -0.635,3.302
  other v1: -0.762,-8.407 78.105,-8.407 95.631,-8.407 98.679,-8.407 106.172,-8.407 74.93,-8.382 101.6,-8.382 -3.175,-8.255 -6.985,-7.62 -5.08,-7.62 71.247,-7.112 42.799,-6.477 44.45,-6.477 102.235,-6.35 26.67,-5.715 28.575,-5.715 38.227,-5.715 74.295,-5.715 76.708,-5.715 -8.89,-5.08 -6.985,-5.08 -5.08,-5.08 10.16,-5.08 13.97,-5.08 16.383,-5.08 52.705,-5.08 56.134,-5.08 58.42,-4.572 64.897,-4.572 67.437,-4.572 19.05,-4.445 24.765,-4.445 39.497,-4.445 95.25,-4.445 97.155,-4.445 99.06,-4.445 104.14,-4.445 20.32,-3.81 26.67,-3.81 28.575,-3.81 15.875,-3.175 33.02,-3.175 34.29,-3.175 35.56,-3.175 85.725,-3.175 86.995,-3.175 105.791,-3.048 100.711,-2.667 -8.89,-2.54 -6.985,-2.54 -5.08,-2.54 41.783,-2.032 42.545,-2.032 43.307,-2.032 93.218,-1.397 20.955,-1.27 33.02,-1.27 34.29,-1.27 41.783,-1.27 43.307,-1.27 101.981,-1.27 15.875,-0.635 55.88,-0.508 58.547,-0.508 62.23,-0.508 66.04,-0.508 70.104,-0.508 -8.89,0 -6.985,0 -5.08,0 28.575,0 33.02,0.635 99.822,0.889 103.251,0.889 28.575,1.27 29.845,1.27 31.115,1.27 32.385,1.27 15.875,1.905 106.604,2.464 -8.89,2.54 -6.985,2.54 -5.08,2.54 36.322,3.048 28.575,3.175 29.845,3.175 31.115,3.175 72.39,3.175 74.295,3.175 91.161,3.302 -3.81,3.81 -1.27,3.81 0,3.81 15.875,3.81 17.78,3.81 125.095,4.064 63.754,4.445 66.548,4.445 99.066,4.445 56.515,4.826 57.785,4.826 59.055,4.826 -8.89,5.08 -6.985,5.08 -5.08,5.08 23.495,5.08 50.8,5.08 108.839,5.207 49.657,5.588 10.16,5.715 12.7,5.715 15.875,5.715 17.78,5.715 20.955,5.715 43.561,5.842 74.295,5.969 91.11,6.096 -3.81,6.35 -1.27,6.35 0,6.35 22.86,6.35 57.785,6.35 99.06,6.35 102.87,6.35 104.521,6.35 112.522,6.985 114.3,6.985 -8.89,7.62 -6.985,7.62 -5.08,7.62 57.785,7.62 74.295,8.23 76.835,8.23 28.575,8.255 30.48,8.255 0,8.285 2.54,8.285 5.08,8.285 7.62,8.285 10.16,8.285 12.7,8.285 15.24,8.285 17.78,8.285 20.32,8.285 22.86,8.285 25.4,8.285 87.376,8.28
INT_APT: U6.12
INT_FP: P1.2 U6.5 | length 52.7
  Top Layer w0.178: U6.5@42.745,-3.27 42.745,-3.883 43.053,-4.191
  Top Layer w0.203: v1@17.636,-1.126 ccw(c17.289,-0.779) 17.78,-0.779 ccw(c18.271,-0.779) v1@17.924,-1.126 ; v1(17.78,-1.27) 17.78,0.635 18.669,1.524 ; 21.59,1.524 18.669,1.524 ; 24.463,1.524 cw(c24.463,0.963) P1.2@24.86,1.36 ; 24.579,1.524 ccw(c24.579,1.921) P1.2@24.86,1.64 ; P1.2@25.4,1.5 25.376,1.524 18.669,1.524 ; 43.053,-4.191 43.688,-4.826 v1(45.085,-4.826) ; v1@44.941,-4.97 ccw(c44.594,-5.317) 44.594,-4.826 ccw(c44.594,-4.335) v1@44.941,-4.682
  Bottom Layer w0.203: v1@17.636,-1.414 cw(c17.289,-1.761) 17.78,-1.761 cw(c18.271,-1.761) v1@17.924,-1.414 ; v1(17.78,-1.27) 17.78,-5.715 18.52,-6.455 40.981,-6.455 42.124,-5.312 44.599,-5.312 v1(45.085,-4.826) ; v1@44.882,-4.826 cw(c44.391,-4.826) 44.738,-5.173 cw(c45.085,-5.52) v1@45.085,-5.029
IRQ_TSM12: U6.6
M3V3: C2.1 C20.1 C23.1 C39.1 C41.1 C42.1 J1.1 P1.1 Q2.S R2.1 R3.1 U4.2 U6.16 UB1.8 | length 148.9
  Top Layer w0.305: R3.1@112.395,-1.194 R3.1@112.471,-1.27
  Top Layer w0.406: v1(18.923,2.54) 25.36,2.54 P1.1@25.4,2.5 ; 24.67,2.54 cw(c24.67,2.17) P1.1@24.932,2.432 ; 44.577,0.254 47.168,0.254 C42.1@48.184,1.27 48.26,1.346 v1(48.26,6.604) ; 47.762,0.849 cw(c48.184,0.427) C42.1@48.184,1.023 ; C42.1@48.045,1.459 ccw(c47.525,1.979) 48.26,1.979 ; C41.1@48.045,2.732 cw(c47.525,2.212) 48.26,2.212 ; C41.1@48.045,3.11 ccw(c47.525,3.63) 48.26,3.63 ; v1(87.757,2.718) cw(c87.757,1.936) C20.1@88.508,2.154 ; 88.298,2.718 cw(c88.298,2.093) C20.1@88.898,2.267 ; C39.1@105.195,1.081 cw(c104.675,0.561) 105.41,0.561 ; UB1.8@105.41,-1.21 v1(105.41,0) C39.1@105.41,1.194 ; R3.1@112.332,-1.081 ccw(c111.996,-0.745) 112.471,-0.745 ccw(c112.946,-0.745) R3.1@112.61,-1.081 ; R2.1@112.332,0.192 cw(c111.996,-0.144) 112.471,-0.144 cw(c112.946,-0.144) R2.1@112.61,0.192 ; 112.395,1.09 ccw(c113.13,1.09) R2.1@112.61,0.57 ; v1(112.395,1.905) 112.395,0.457 R2.1@112.471,0.381 R3.1@112.471,-1.27
  Top Layer w0.508: Q2.S@88.436,3.92 cw(c87.93,3.414) 88.646,3.414 ; U4.2@88.441,-1.795 cw(c87.947,-2.289) v1@88.646,-2.289 ; U4.2@88.441,-1.507 ccw(c87.947,-1.013) 88.646,-1.013 ; Q2.S@88.58,4.064 88.646,3.998 v1(88.646,2.718) v1(88.646,-2.286) ; 88.646,-0.812 cw(c89.433,-0.812) C23.1@88.876,-0.256 ; 88.646,1.066 ccw(c89.433,1.066) C23.1@88.876,0.51 ; 88.646,1.634 cw(c89.172,1.634) C20.1@88.8,2.006 ; v1@88.646,2.684 ccw(c89.172,2.684) C20.1@88.8,2.312 ; v1@88.646,2.684 ccw(c89.172,2.684) C20.1@88.8,2.312 ; v1@88.646,2.684 ccw(c89.172,2.684) C20.1@88.8,2.312
  Top Layer w0.762: v1(87.757,2.718) v1(88.646,2.718)
  Bottom Layer w0.305: v1(88.646,-2.286) 99.314,-2.286 101.6,0 v1(105.41,0) 110.49,0 v1(112.395,1.905) ; C2.1@88.754,-2.394 cw(c89.014,-2.654) 89.014,-2.286 cw(c89.014,-1.918) C2.1@88.754,-2.178 ; C2.1@89.344,-2.002 ccw(c90.031,-1.315) C2.1@90.031,-2.286 ; v1@105.302,-0.108 ccw(c105.042,-0.368) 105.042,0 ccw(c105.042,0.368) v1@105.302,0.108 ; v1@105.518,-0.108 cw(c105.778,-0.368) 105.778,0 cw(c105.778,0.368) v1@105.518,0.108 ; v1@112.243,1.905 cw(c111.875,1.905) 112.135,1.645 cw(c112.395,1.385) v1@112.395,1.753
  Bottom Layer w0.406: v1(18.923,2.54) 22.86,2.54 26.162,5.842 39.37,5.842 ; 39.599,6.071 ccw(c39.072,6.598) J1.1@39.773,6.851 ; J1.1@40.005,6.985 40.005,6.477 ; J1.1@40.251,6.958 ccw(c40.64,6.995) 40.64,6.604 ; 41.783,6.604 41.148,6.604 ; v1(87.757,2.718) 86.817,2.718 85.236,4.299 71.99,4.299 70.51,2.819 54.458,2.819 50.673,6.604 v1(48.26,6.604) 41.148,6.604 ; 39.37,5.842 39.878,5.842 ; 39.37,5.842 40.005,6.477 ; 39.878,5.842 40.386,5.842 41.148,6.604 ; 39.878,5.842 40.64,6.604 ; 40.005,6.477 40.132,6.604 40.64,6.604 ; 40.64,6.604 41.148,6.604
  Bottom Layer w0.762: v1(87.757,2.718) v1(88.646,2.718)
MOTO+: P4.2 U5.8 | length 6
  Top Layer w0.508: U5.8@100.965,5.775 U5.8@101.025,5.715
  Top Layer w0.66: U5.8@100.965,5.775 v1(100.965,6.35)
  Bottom Layer w0.762: v1@100.965,6.239 ccw(c102.867,6.239) P4.2@101.522,4.894 ; v1(100.965,6.35) 100.965,5.461 ; 101.109,5.317 cw(c100.602,4.81) P4.2@101.319,4.81 ; P4.2@101.449,4.928 cw(c101.5,5.461) 100.965,5.461 ; P4.2@102.338,4.81 101.616,4.81 100.965,5.461
MOTO-: P4.1 U5.5 | length 6.4
  Top Layer w0.508: U5.5@100.965,1.845 U5.5@101.025,1.905
  Top Layer w0.66: v1(100.965,1.27) U5.5@100.965,1.845
  Bottom Layer w0.508: P4.1@101.616,2.81 101.743,2.81 P4.1@102.338,2.81
  Bottom Layer w0.762: v1(100.965,1.27) 100.965,2.032 P4.1@101.743,2.81 ; v1@100.965,1.381 cw(c102.867,1.381) P4.1@101.522,2.726 ; 100.965,1.9 cw(c101.842,1.9) P4.1@101.486,2.701 ; 101.118,2.185 ccw(c100.611,2.691) P4.1@101.32,2.793
NetBZ1_1: BZ1.1 C24.2 R47.1 | length 12
  Top Layer w0.508: R47.1@108.026,6.35 BZ1.1@110.331,6.35 ; 109.271,6.35 cw(c109.271,4.972) BZ1.1@110.245,5.946 ; BZ1.1@110.49,6.353 cw(c110.49,5.44) 111.135,6.086 ; BZ1.1@110.836,6.191 ccw(c111.671,6.191) 111.081,5.6 ccw(c110.49,5.01) 110.49,5.845 cw(c110.49,3.706) C24.2@112.002,5.219 ; 111.58,5.641 ccw(c112.091,6.152) C24.2@112.091,5.429 ; C24.2@112.141,5.283 C24.2@111.938,5.283 ; BZ1.1@110.331,6.35 110.871,6.35 C24.2@111.938,5.283 ; BZ1.1@110.331,6.35 BZ1.1@110.49,6.191 111.398,5.283 C24.2@111.938,5.283
NetBZ1_2: BZ1.2 C24.1 T1.3 | length 24.9
  Top Layer w0.508: T1.3@109.44,3.607 cw(c109.44,2.359) 110.322,3.241 ; T1.3@109.477,3.68 cw(c107.989,2.191) BZ1.2@110.094,2.191 ; T1.3@109.583,3.666 cw(c110.053,3.197) 110.053,3.861 ; T1.3@109.643,3.81 ccw(c110.358,3.81) 109.852,3.305 ; 110.119,3.445 cw(c108.946,2.273) BZ1.2@110.602,2.185 ; BZ1.2@110.21,2.471 ccw(c109.534,3.147) 110.49,3.147 ccw(c111.446,3.147) BZ1.2@110.77,2.471 ; BZ1.2@110.382,2.16 cw(c111.451,2.463) 110.665,3.249 ; BZ1.2@110.49,2.191 BZ1.2@110.49,2.54 ; BZ1.2@110.871,2.299 cw(c112.404,2.734) 111.277,3.861 ; BZ1.2@110.886,2.191 cw(c112.685,2.191) 111.413,3.463 ; 111.363,3.413 cw(c112.091,2.686) C24.1@112.091,3.715 ; C24.1@112.141,3.861 C24.1@111.811,3.861 ; T1.3@109.347,3.81 BZ1.2@110.49,2.667 ; T1.3@109.347,3.81 109.753,3.81 110.49,3.073 ; T1.3@109.347,3.81 109.398,3.861 110.49,3.861 ; BZ1.2@110.49,2.54 BZ1.2@110.49,2.667 ; BZ1.2@110.49,2.54 C24.1@111.811,3.861 ; BZ1.2@110.49,2.667 110.49,3.073 ; 110.49,3.073 cw(c109.705,3.073) 110.227,2.487 ccw(c109.705,3.073) 110.49,3.073 ; 110.49,3.073 ccw(c111.275,3.073) 110.753,2.487 cw(c111.275,3.073) 110.49,3.073 ; 110.49,3.073 110.49,3.861 ; 110.49,3.073 111.277,3.861 ; 110.49,3.861 111.277,3.861 ; 111.277,3.861 C24.1@111.811,3.861
NetC29_1: 
NetC29_2: C30.2 C32.2 pad.RF | length 7.4
  Top Layer w0.508: pad.RF@30.87,-2.55 cw(c30.28,-3.14) 31.115,-3.14 cw(c31.95,-3.14) pad.RF@31.36,-2.55 ; pad.RF@31.115,-1.905 C32.2@31.115,-5.131 31.166,-5.08 C30.2@33.579,-5.08 ; C32.2@31.268,-5.234 cw(c31.64,-5.606) 31.64,-5.08
NetC30_1: C30.1 L2.1 | length 2.5
  Top Layer w0.406: L2.1@36.83,-5.08 L2.1@36.962,-4.948
  Top Layer w0.762: C30.1@35.001,-5.08 L2.1@36.83,-5.08 ; 36.477,-5.08 ccw(c36.477,-4.462) L2.1@36.913,-4.899
NetC34_1: C34.1 U6.19 | length 5.5
  Top Layer w0.152: C34.1@44.456,3.613 cw(c44.163,3.32) 44.577,3.32 cw(c44.991,3.32) C34.1@44.698,3.613
  Top Layer w0.178: U6.19@43.145,0.73 43.145,1.489 44.577,2.921 C34.1@44.577,3.734 ; C34.1@44.348,3.505 cw(c43.795,2.952) 44.577,2.952 cw(c45.359,2.952) C34.1@44.806,3.505
NetC37_1: C37.1 U6.17 | length 5.6
  Top Layer w0.178: U6.17@43.945,0.73 43.945,1.146 44.577,1.778 45.339,1.778 46.355,2.794 C37.1@46.355,3.734 ; C37.1@46.135,3.514 cw(c45.604,2.983) 46.355,2.983 cw(c47.106,2.983) C37.1@46.575,3.514
NetC37_2: C37.2 U6.18 | length 7.6
  Top Layer w0.152: 45.717,4.518 ccw(c45.079,5.156) C37.2@45.981,5.156 ; 45.838,4.639 cw(c46.305,4.171) C37.2@46.305,4.832 ; C37.2@45.977,4.778 ccw(c45.599,5.156) C37.2@46.134,5.156
  Top Layer w0.178: U6.18@43.545,0.73 43.545,1.28 44.424,2.159 44.958,2.159 45.466,2.667 45.466,4.267 C37.2@46.355,5.156
NetC38_2: C38.2 U6.3 X1.3 | length 10.4
  Top Layer w0.178: 41.848,-7.681 ccw(c42.379,-7.15) X1.3@42.379,-7.901 ; U6.3@41.945,-3.27 41.945,-4.918 41.529,-5.334 41.529,-7.362 X1.3@42.379,-8.212 ; 41.969,-7.802 cw(c41.608,-8.162) X1.3@42.118,-8.162
  Top Layer w0.203: X1.3@42.379,-8.212 43.68,-8.212 C38.2@43.942,-7.95 ; X1.3@42.555,-8.388 cw(c42.979,-8.812) 42.979,-8.212 cw(c42.979,-7.612) X1.3@42.555,-8.036 ; 43.03,-8.212 ccw(c43.03,-7.088) C38.2@43.825,-7.883 ; C38.2@43.521,-8.212 ccw(c43.521,-7.579) C38.2@43.968,-8.027
NetC43_1: C43.1 UB1.1 Y2.1 | length 13.9
  Top Layer w0.203: UB1.1@105.27,-5.82 ccw(c104.931,-5.481) 105.41,-5.481 ccw(c105.889,-5.481) UB1.1@105.55,-5.82 ; UB1.1@105.41,-6.41 105.41,-5.105 106.324,-4.191 109.347,-4.191 110.363,-3.175 ; Y2.1@110.675,-3.353 ccw(c110.363,-3.538) 110.363,-3.175 ; Y2.1@110.675,-2.997 cw(c110.363,-2.812) 110.363,-3.175 ; Y2.1@111.521,-3.421 cw(c112.116,-4.016) 112.116,-3.175 cw(c112.116,-2.334) Y2.1@111.521,-2.929 ; 112.048,-3.175 ccw(c112.048,-2.192) C43.1@112.743,-2.887 ; 112.419,-3.175 cw(c112.419,-3.633) C43.1@112.743,-3.309 ; 112.538,-3.175 ccw(c112.538,-2.682) C43.1@112.886,-3.031 ; C43.1@112.827,-3.175 Y2.1@111.125,-3.175 110.363,-3.175
NetC45_2: C45.2 UB1.2 Y2.2 | length 13.4
  Top Layer w0.203: UB1.2@106.54,-5.82 ccw(c106.201,-5.481) 106.68,-5.481 ccw(c107.159,-5.481) UB1.2@106.82,-5.82 ; UB1.2@106.68,-6.41 106.68,-5.207 107.188,-4.699 C45.2@112.954,-4.699 ; 109.835,-4.699 ccw(c109.835,-3.435) Y2.2@110.729,-4.329 ; 110.325,-4.699 ccw(c110.325,-3.925) Y2.2@110.872,-4.472 ; 110.433,-4.699 cw(c110.433,-5.117) Y2.2@110.729,-4.821 ; Y2.2@111.378,-4.472 ccw(c111.925,-3.925) 111.925,-4.699 ; Y2.2@111.521,-4.821 cw(c111.817,-5.117) 111.817,-4.699 ; Y2.2@111.521,-4.329 ccw(c112.415,-3.435) 112.415,-4.699 ; C45.2@112.743,-4.91 ccw(c112.233,-5.419) 112.233,-4.699 ccw(c112.233,-3.979) C45.2@112.743,-4.488
NetC49_1: 